# Altium PCB RZ7899_Motor_V1.0.0.PcbDoc
Units mil, origin at the board's own origin, x right, y up, seen from the top; angles counter-clockwise.
Board outline 2646.94 x 1477.3 mil, 2 copper layers (Top Layer, Bottom Layer); 41 components, 20 nets, 113 pads, 0 vias.
Unrouted connection lines stored in the file: 43.
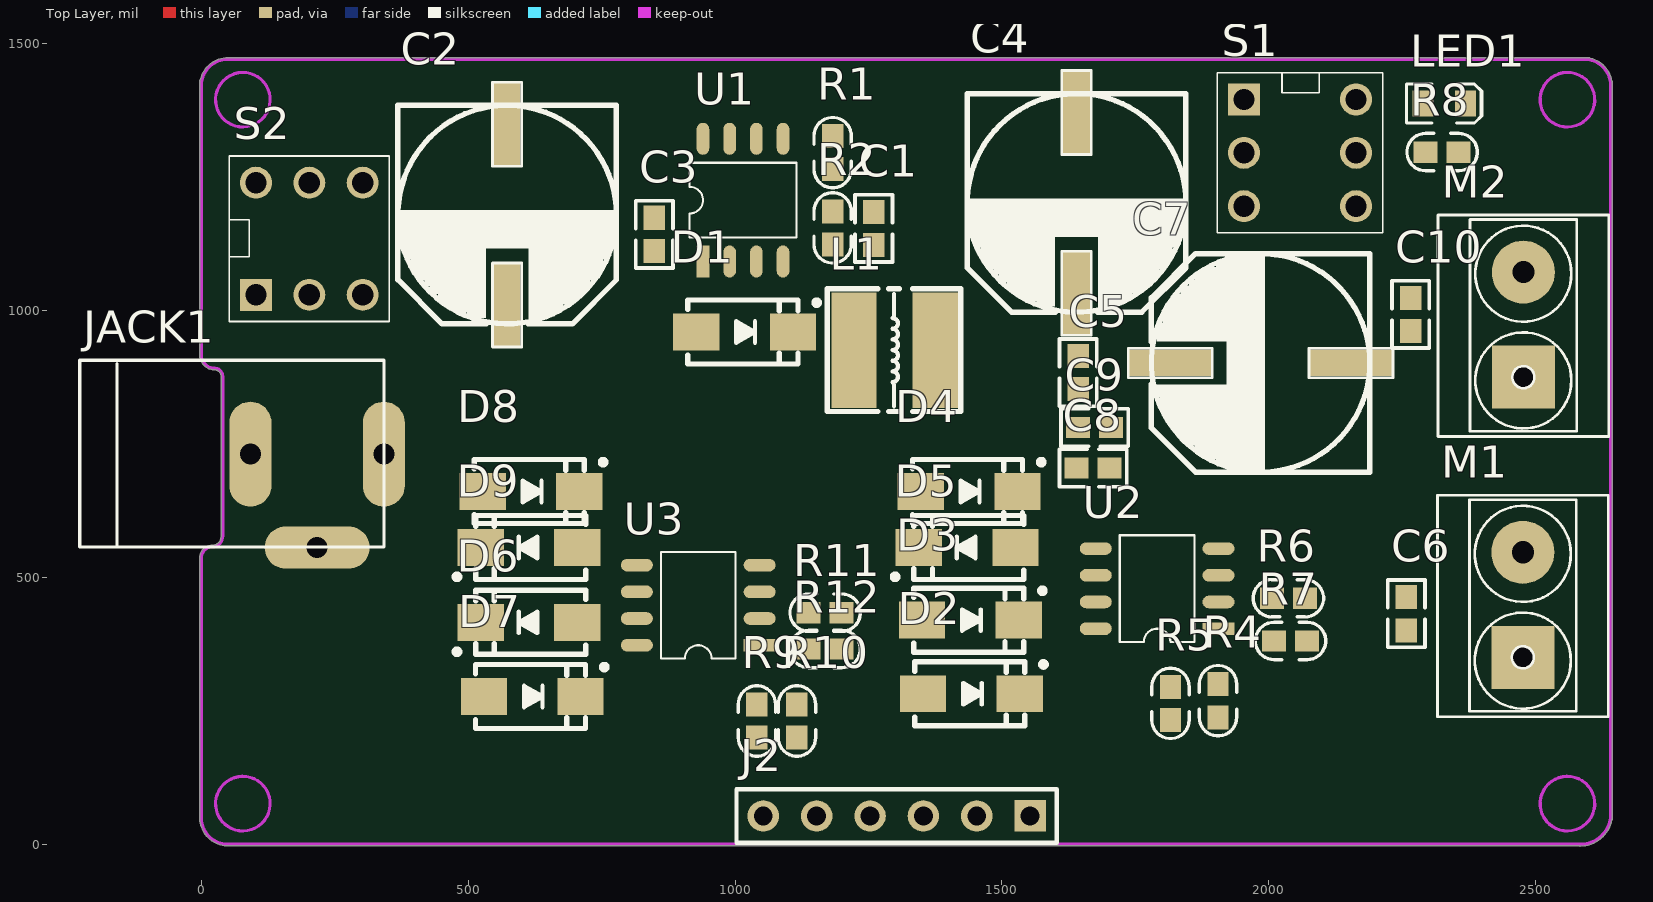
[diagram p0: Top Layer view]
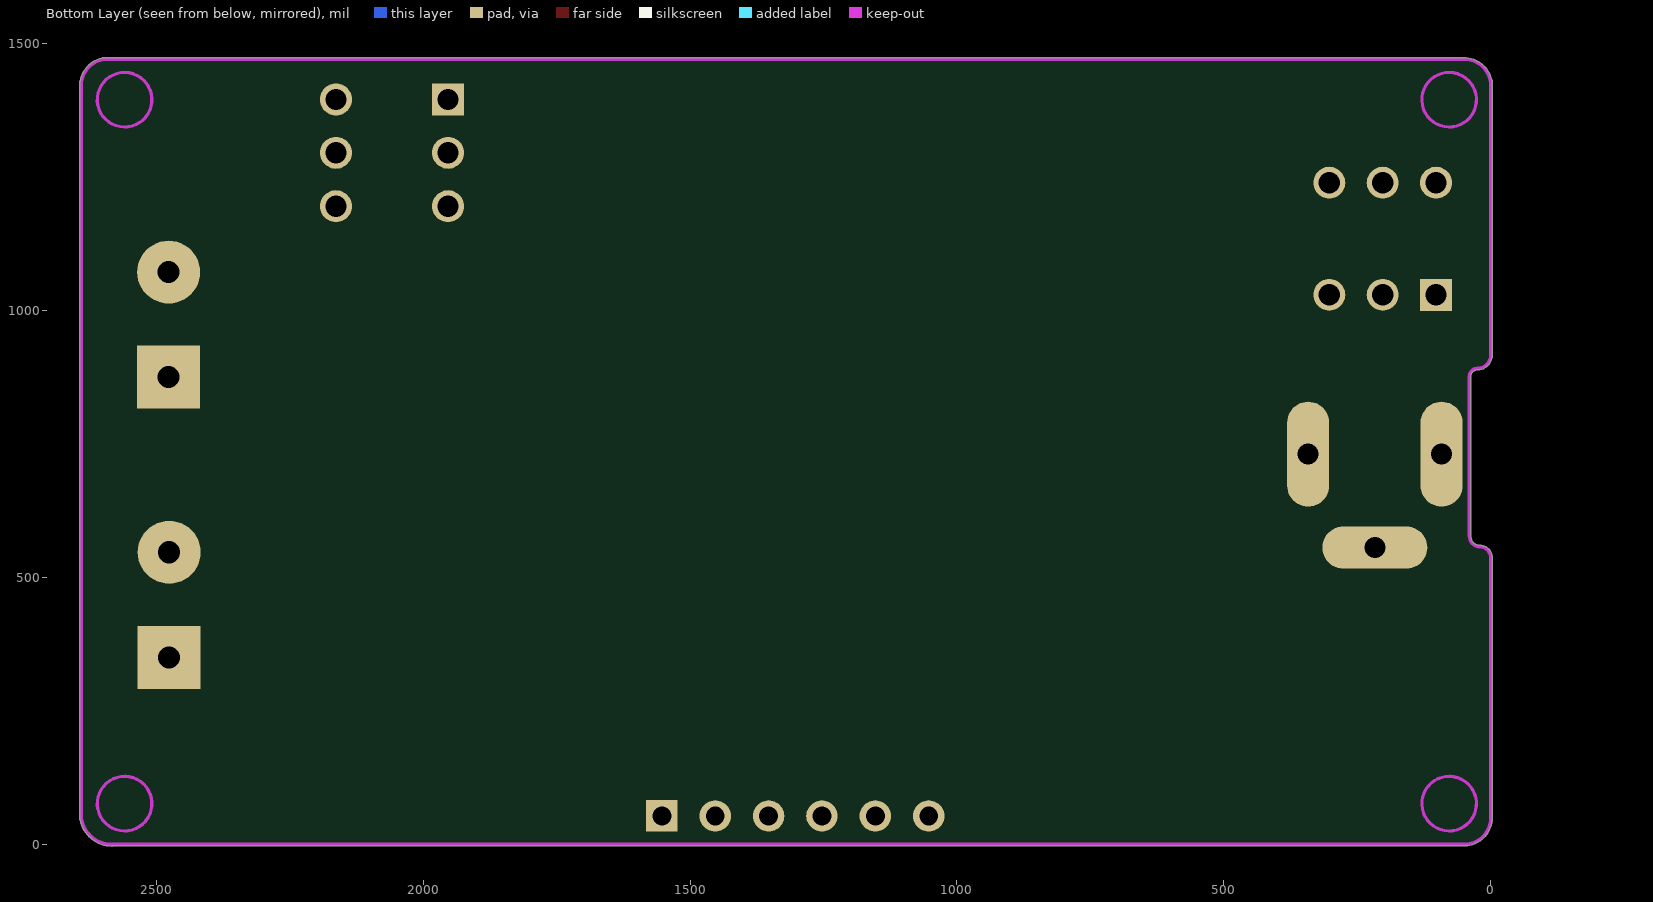
[diagram p1: Bottom Layer view, seen from below]

## Layer stack, top to bottom
Top Layer: signal copper 1.4
Dielectric: dielectric 12.6, FR-4, Dk 4.8
Bottom Layer: signal copper 1.4

## Board outline
-2.97,49 -2.97,537 cw(c20,537) 20,559.97 ccw(c20,577) 37.03,577 37.03,877 ccw(c25,877) 25,889.03 cw(c25,917) -2.97,917 -2.97,1430 cw(c0,1430) -1.72,1432.42 cw(c50,1421) 50,1473.97 cw(c50,1471) 50.5,1473.93 cw(c51,1471) 51,1473.97 2600,1473.97 cw(c2600,1471) 2602.42,1472.72 cw(c2591,1421) 2643.2,1429.99 cw(c2641,1428) 2643.97,1428 2643.97,1330 2643.97,1332 ccw(c2641,1332) 2643.97,1332.03 2643.97,1332 2643.97,339.36 cw(c2641,339.36) 2643.97,339.33 2643.97,48 cw(c2641,48) 2642.9,45.72 cw(c2583.64,57) 2593.6,-2.5 cw(c2592,0) 2592,-2.97 2590.23,-2.97 cw(c2583.64,57) 2583.64,-3.33 cw(c2583.64,-0.36) 2582.22,-2.97 2097.64,-2.97 ccw(c2097.64,0) 2097.67,-2.97 2097.64,-2.97 45,-2.97 cw(c45,0) 43.51,-2.57 cw(c50,50) -2.95,48.69 cw(c0,49)

## Design rules (kind name [scope] priority, off if disabled: settings)
Clearance Clearance_3 [(InNetClass('BLE_ANT'))] p1: gap=4
Clearance Clearance_2 [InComponent('U3')] p2: gap=5
Clearance Clearance_1 [InNamedPolygon('PCB top') Or  InNamedPolygon('PCB bottom')] p3: gap=12
Clearance [All] p4: gap=6
ComponentClearance [All] p1 off: gap=10 collisioncheckmode=3 verticalgap=10 showdistances=FALSE
DiffPairsRouting DiffPair_USBDiffPairsRouting [InDifferentialPair ('USB')] p1: maxlimit=7.87 minlimit=7.87 mostfreqgap=7.87 maxuncoupledlength=500
DiffPairsRouting [All] p2: maxlimit=10 minlimit=10 mostfreqgap=10 maxuncoupledlength=500
FabricationTestPointUsage TestPointUsage [All] p1: valid=0 allowmultiple=FALSE
FabricationTestpoint Testpoint [(IsPad And (OnTopLayer Or OnBottomLayer))] p1: side=3 testpointundercomponent=TRUE minsize=40 maxsize=100 preferedsize=60 minholesize=0 maxholesize=40 preferedholesize=32 testpointgrid=1 allowsidetop=TRUE allowsidebottom=TRUE usegrid=TRUE gridtolerance=0.01
MatchedLengths DiffPair_USBMatchedLengths [InDifferentialPair ('USB')] p1: tolerance=1000 checknetsindiffpair=TRUE checkdiffpairvsdiffpair=FALSE checkothers=FALSE
PolygonConnect via [Isvia vs IsNamedPolygon('PCB top') Or  IsNamedPolygon('PCB bottom')] p1: connectstyle=Direct reliefconductorwidth=10 reliefentries=4 polygonreliefangle="90 Angle"
PolygonConnect wire [All vs IsNamedPolygon('PCB top') Or  IsNamedPolygon('PCB bottom')] p2: connectstyle=Relief reliefconductorwidth=25 reliefentries=4 polygonreliefangle="90 Angle"
PolygonConnect [All] p3: connectstyle=Relief reliefconductorwidth=10 reliefentries=4 polygonreliefangle="90 Angle"
RoutingVias [All] p1: holewidth=14 width=24 viastyle="Through Hole" minholewidth=10 minwidth=20 maxholewidth=50 maxwidth=100
SilkscreenOverComponentPads [All] p1: minsilkscreentomaskgap=10
SolderMaskExpansion [All] p1: expansion=4
Width [All] p1: maxlimit=50 minlimit=7.87 preferedwidth=10
23 further rules are at their usual default settings.

## Components (designator, comment, footprint, x,y, rotation, side; value= is the part's Value field where it differs from the comment)
C1 "3.3nF" C0603 1260,1154 r0 top
C2 "470uF" CAP_UF_E12 573,1011 r270 top
C3 "1uF" C0603 849,1143 r180 top
C4 "470uF" CAP_UF_E12 1640,1033 r270 top
C5 "1uF" C0603 1643,884 r180 top
C6 "0.1uF" C0603 2258,432 r180 top
C7 "470uF" CAP_UF_E12 1816,902 r180 top
C8 "10uF" C0603 1671,705 r270 top
C9 "0.1uF" C0603 1674,781 r270 top
C10 "0.1uF" C0603 2266,993 r0 top
D1 "1N5820" SMA 1018,960 r0 top
D2 "SS14" SMA 1443,282 r0 top
D3 "SS14" SMA 1441,420 r0 top
D4 "SS14" SMA 1438.8,661 r0 top
D5 "SS14" SMA 1435,556.1 r180 top
D6 "SS14" SMA 614,415.77 r180 top
D7 "SS14" SMA 620,277 r0 top
D8 "SS14" SMA 617.8,661 r0 top
D9 "SS14" SMA 614,556.1 r180 top
J2 "CON6" HDR1X6 1553,53 r180 top
JACK1 "POWER JACK_3" jack-2_5mm_b 57,731 r90 top
L1 "47uH/2A" L_SM5845 1223,926 r0 top
LED1 "RED" LED-0805-R 2329,1388 r0 top
M1 "Motor" PWR_2PIN 2476,349 r0 top
M2 "Motor" PWR_2PIN 2477,874 r0 top
R1 "1K" R0603 1183,1296 r0 top
R2 "3.9K" R0603 1183,1155 r0 top
R4 "300R" R0603 1905,269 r180 top
R5 "300R" R0603 1816,264 r180 top
R6 "10K" R0603 2037,461 r270 top
R7 "10K" R0603 2041,381 r270 top
R8 "10K" R0603 2325,1297 r270 top
R9 "300R" R0603 1041,231 r180 top
R10 "300R" R0603 1116,231 r180 top
R11 "10K" R0603 1169,434 r270 top
R12 "10K" R0603 1169,366 r270 top
S1 "SWITCH" SWITCH_DDSZ 2059,1296 r270 top
S2 "SWITCH" SWITCH_DDSZ 202,1135 r0 top
U1 "XL1509" SOP-8 1015,1207 r0 top
U2 "RZ7899" SOP-8 1791,479 r90 top
U3 "RZ7899" SOP-8 931,448 r90 top

## Footprints (in the part's own frame and the unit in brackets; to place one, negate y for a bottom-side part, rotate by r counter-clockwise, add the part's x,y. Pads: shape width x height; smd on the part's side, far side on the other; paste and mask are expansions set on the pad)
C0603 [mil] "SMT电容"
  rect 40x45 smd: 1(0,31) 2(0,-31)
  silkscreen extent -35,-63 35,63, body extent -18,-32 18,31, height 31
CAP_UF_E12 [mil] "L-8.3/W-8.3/H-11.9"
  rect 155x50 smd: 1(0,0) 2(-338,0)
  silkscreen extent -417,-205 79,205
HDR1X6 [mm] "Connector; Header; 6 Position"
  rect 1.5x1.5 hole 0.9: 1(0,0)
  round 1.5 hole 0.9: 2(2.54,0) 3(5.08,0) 4(7.62,0) 5(10.16,0) 6(12.7,0)
  silkscreen extent -1.27,-1.27 13.97,1.27
jack-2_5mm_b [mm] "JACK-2_5MM_B"
  oval 5x2 hole 1: 1(0,-7.239) 2(0,-0.889)
  oval 2x5 hole 1: 3(-4.445,-4.064)
  silkscreen extent -4.42,-7.24 4.47,7.24
L_SM5845 [mm] "5.8x5.2x4.5mm"
  rect 2.15x5.5 smd: 1(0,0) 2(3.867,0)
  silkscreen extent -1.27,-2.92 5.08,2.92, body extent -0.51,-1.5 2.91,1.5, height 2.15
LED-0805-R [mm]
  rect 1x1.25 smd: 1(-1,0)
  rect 1x1.25 smd mask+0.102: 2(1,0)
  silkscreen extent -1.8,-0.92 1.8,0.92, body extent -1.01,-0.62 1.01,0.63, height 1.1
PWR_2PIN [mm]
  rect 3x3 hole 1.05: 1(0.005,0.033)
  round 3 hole 1.05: 2(0.005,5.033)
  silkscreen extent -4.06,-2.79 4.07,7.75
R0603 [mil] "SMT电阻"
  rect 40x45 smd: 1(0,31) 2(0,-31)
  silkscreen extent -35,-66 35,66, body extent -15,-31 16,31, height 20
SMA [mm] "4.5x2.6*2.2mm（长宽高，不包括引脚）"
  rect 2.2x1.75 smd: 1(-2.3,0) 2(2.3,0)
  silkscreen extent -2.7,-1.52 3.56,1.52, body extent -3.78,-0.05 1.32,2.55, height 2.15
SOP-8 [mil]
  rect 23.62x60 smd: 1(-75,-115)
  oval 23.62x60 smd: 2(-25,-115) 3(25,-115) 4(75,-115) 5(75,115) 6(25,115) 7(-25,115) 8(-75,115)
  silkscreen extent -100,-70 100,70, body extent -100,-119 98,119, height 63
SWITCH_DDSZ [mil] "SWITCH_DDSZ"
  rect 60x60 hole 40: 1(-99.65,-105.34)
  round 60 hole 40: 2(0.35,-105.34) 3(100.35,-105.34) 4(100.35,104.66) 5(0.35,104.66) 6(-99.65,104.66)
  silkscreen extent -150,-155 150,155

## Part data
C1 C3 C5 C6 C8 C9 C10: library part CAP, "SMT电容"
C2 C4 C7: library part CAP_1
D1 D2 D3 D4 D5 D6 D7 D8 D9: library part "Diode BAT17", "Silicon RF Schottky Diode for Mixer Applications in the VHF/UHF Range"
J2: "Connector"
L1: library part L-CD, "贴片功率电感"
LED1: library part LED1
M1 M2: library part Motor_720, "Motor, General Kind"
R1 R2 R4 R5 R6 R7 R8 R9 R10 R11 R12: library part RES1, "SMT电阻"

## Nets (pads, with @x,y where several pads share a name; then routed paths per layer and width w, separated by ;. In a path a pad name is that pad's centre, name@x,y a point inside that pad or via, vN(x,y) a via of type N, cw(c..) or ccw(c..) an arc to the next point about the centre after c; other vN are vias at no path point)
GND: C2.2 C3.2 C4.2 C5.2 C7.2 C8.2 C9.2 D1.1 D3.1 D4.1 D7.1 D8.1 J2.5 JACK1.2 JACK1.3 LED1.2 R1.1 R6.1 R7.1 R11.1 R12.1 U1.4 U1.5 U1.6 U1.7 U1.8 U2.3 U3.3
M2_BI: J2.4 R9.1
M2_FI: J2.3 R10.1
NetC1_1: C1.1 R1.2 R2.1 U1.3
NetC6_1: C6.1 D2.1 D3.2 M1.1 U2.7 U2.8
NetC6_2: C6.2 D4.2 D5.1 M1.2 U2.5 U2.6
NetC10_1: C10.1 D6.1 D7.2 M2.1 U3.7 U3.8
NetC10_2: C10.2 D8.2 D9.1 M2.2 U3.5 U3.6
NetD1_2: D1.2 L1.1 U1.2
NetJ2_1: J2.1 R4.1
NetJ2_2: J2.2 R5.1
NetJACK1_1: JACK1.1 S2.1 S2.6
NetLED1_1: LED1.1 R8.1
NetR4_2: R4.2 R7.2 U2.1
NetR5_2: R5.2 R6.2 U2.2
NetR9_2: R9.2 R12.2 U3.1
NetR10_2: R10.2 R11.2 U3.2
V_DC_VOUT: C1.2 C4.1 C5.1 L1.2 R2.2 S1.1 S1.6
V_IN: C2.1 C3.1 S2.2 S2.5 U1.1
VCC_M: C7.1 C8.1 C9.1 D2.2 D5.2 D6.2 D9.2 J2.6 R8.2 S1.2 S1.5 U2.4 U3.4
pads on no net: S1.3 S1.4 S2.3 S2.4

## Keep-outs
Keep-Out Layer:
  lines w5.91: 0,49 0,524 ; 0,50 ccw(c50,50) 50,0 ; 0,522 0,537 cw(c20,537) 20,557 ccw(c20,577) 40,577 40,877 ccw(c25,877) 25,892 cw(c25,917) 0,917 0,1430 ; 0,1421 cw(c50,1421) 50,1471 ; 45,0 2097.64,0 2592,0 ; 51,1471 2600,1471 ; 2583.64,-0.36 ccw(c2583.64,57) 2641,57 ; 2591,1471 cw(c2591,1421) 2641,1421 ; 2641,48 2641,344 ; 2641,339.36 2641,1332 ; 2641,1330 2641,1428
  lines w6: 78.83,25 cw(c77.81,76.17) 79,25 ; 78.83,1344 cw(c77.81,1395.17) 79,1344 ; 2560.83,25 cw(c2559.81,76.17) 2561,25 ; 2560.83,1344 cw(c2559.81,1395.17) 2561,1344

## Silkscreen, mask and mechanical layers (free items; w line width, h text height)
Mechanical 1:
  lines w5.91: -40,0 102,0 ; 0,-82 0,87

## Dimensions
2160,1277 to 0,1272 on Top Overlay
0,1277 to 5,177 on Top Overlay

## Text inside footprints (layer, text, board x,y; h text height)
JACK1: Mechanical 11 "2" at 92,721 h25 r90; Mechanical 11 "3" at 217,546 h25 r90; Mechanical 11 "1" at 342,721 h25 r90
S1: Mechanical 11 "5" at 2163.66,1275.65 h25 r270; Mechanical 11 "2" at 1953.66,1275.65 h25 r270; Mechanical 11 "3" at 1953.66,1175.65 h25 r270; Mechanical 11 "6" at 2163.66,1375.65 h25 r270; Mechanical 11 "4" at 2163.66,1175.65 h25 r270; Mechanical 11 "1" at 1953.66,1375.65 h25 r270
S2: Mechanical 11 "5" at 222.35,1239.67 h25; Mechanical 11 "2" at 222.35,1029.67 h25; Mechanical 11 "3" at 322.35,1029.67 h25; Mechanical 11 "6" at 122.35,1239.67 h25; Mechanical 11 "4" at 322.35,1239.67 h25; Mechanical 11 "1" at 122.35,1029.67 h25